# Altium PCB merigold.PcbDoc
Units mm, origin at the board's own origin, x right, y up, seen from the top; angles counter-clockwise.
Board outline 35.56 x 26.67 mm, 2 copper layers (Top Layer, Bottom Layer); 4 components, 14 nets, 35 pads, 0 vias.
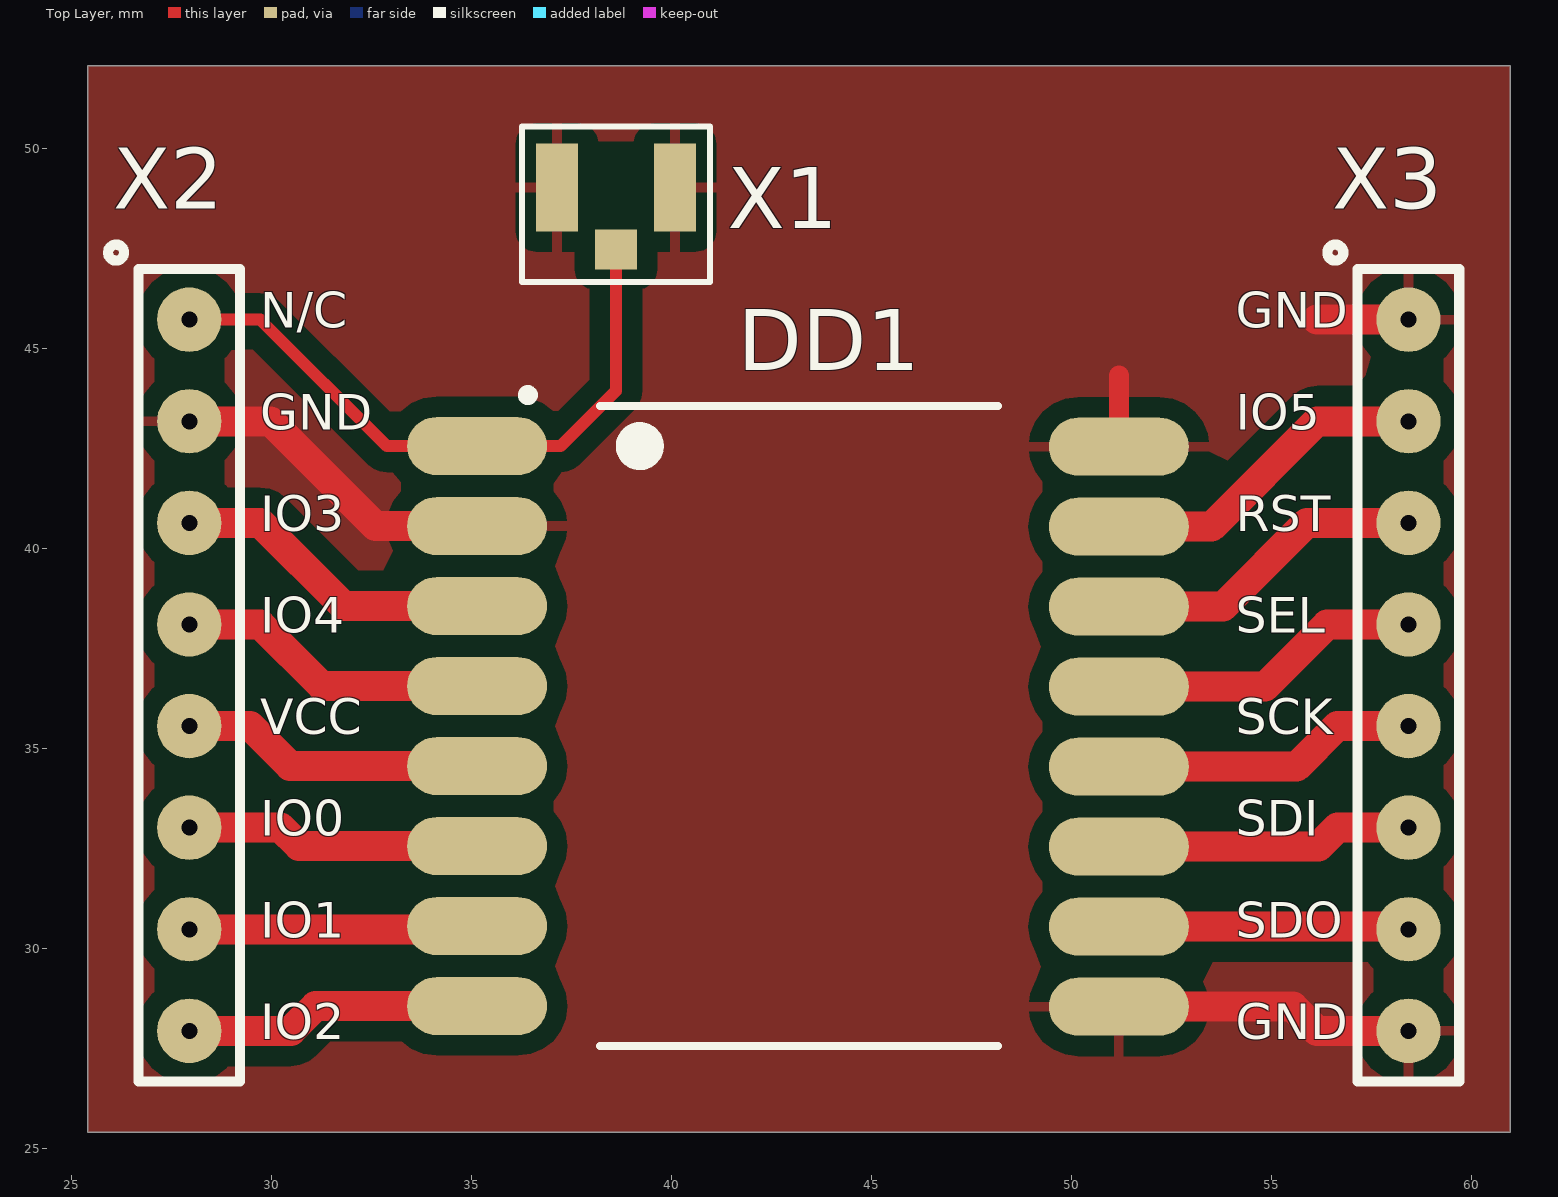
[diagram p0: Top Layer view]
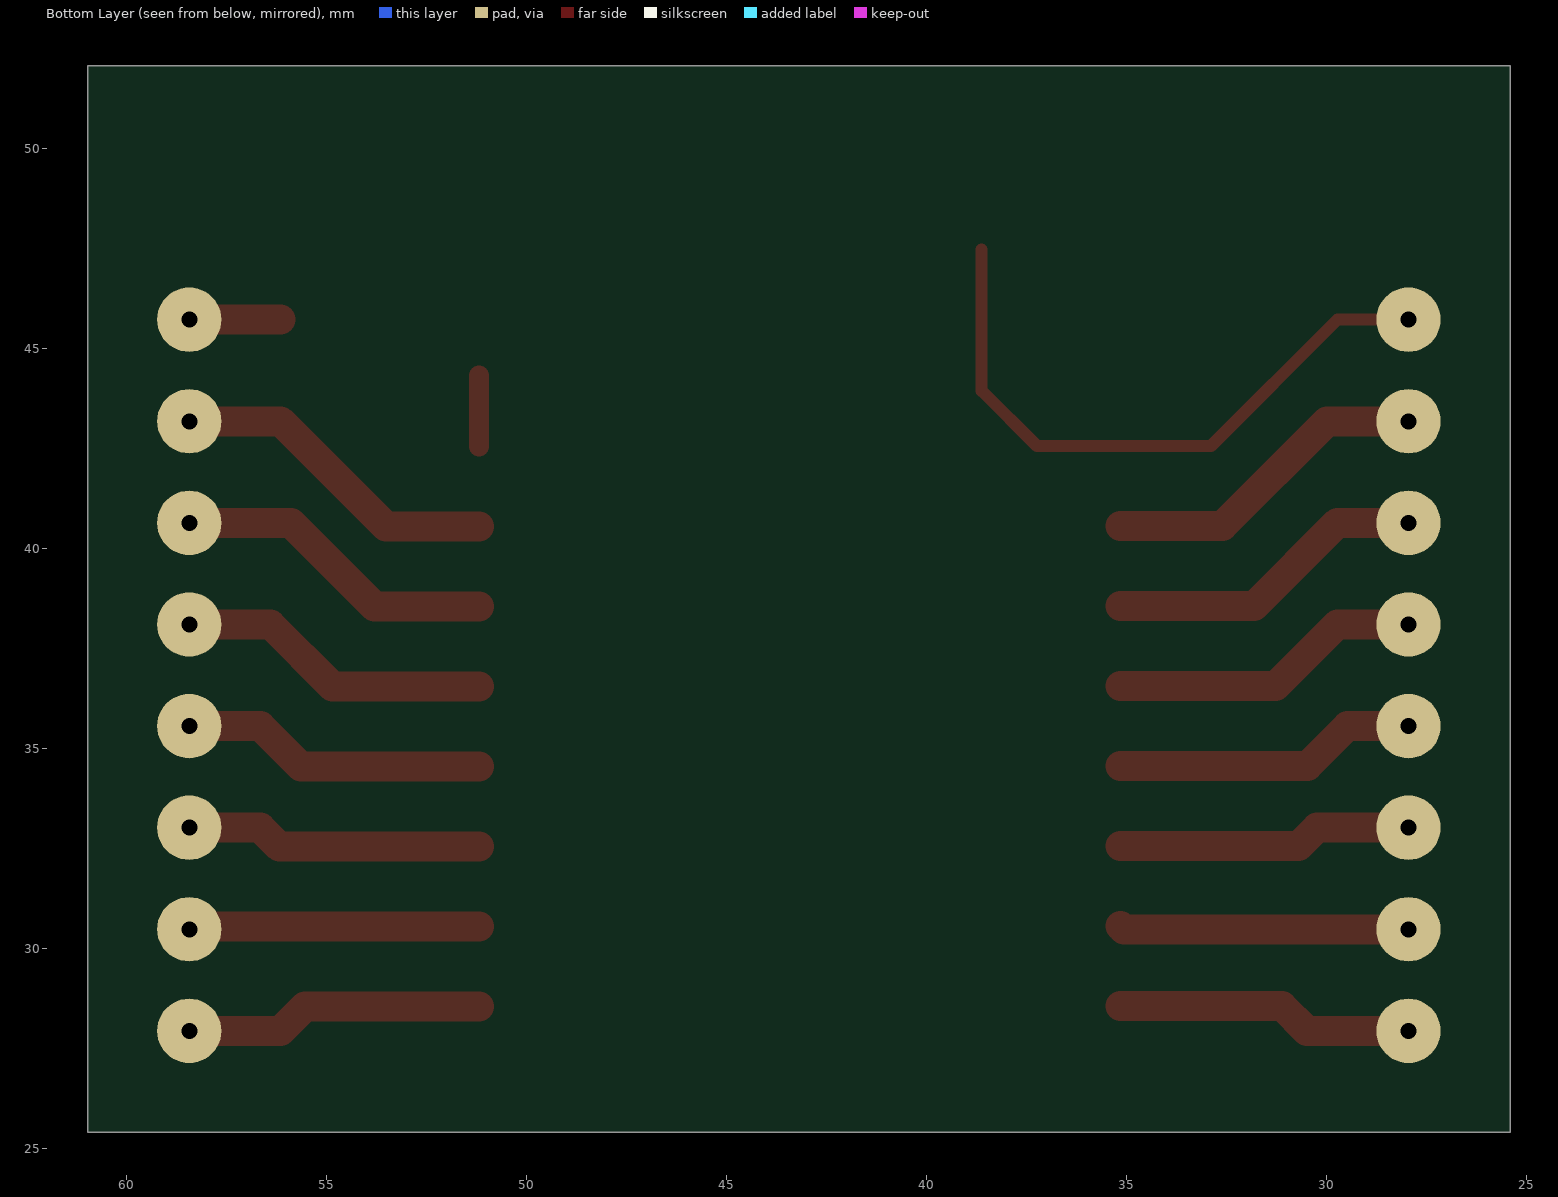
[diagram p1: Bottom Layer view, seen from below]

## Layer stack, top to bottom
Top Solder: solder mask 0.0102, Solder Resist, Dk 3.5
Top Layer: signal copper 0.0356
Dielectric 1: dielectric 0.32, FR-4, Dk 4.8
Bottom Layer: signal copper 0.0356
Bottom Solder: solder mask 0.0102, Solder Resist, Dk 3.5

## Board outline
25.4,25.4 60.96,25.4 60.96,52.07 25.4,52.07

## Design rules (kind name [scope] priority, off if disabled: settings)
Clearance [All] p1: gap=0.5 ignorepadtopadclearanceinfootprint=FALSE
PlaneClearance [All] p1: clearance=1
PlaneConnect [All] p1: planeconnectstyle=Relief reliefexpansion=0.508 reliefentries=4 reliefconductorwidth=0.3 reliefairgap=0.3
PolygonConnect [All] p1: connectstyle=Relief reliefconductorwidth=0.254 reliefentries=4 polygonreliefangle="90 Angle" airgapwidth=0.5
RoomDefinition merigold [InComponentClass('merigold')] p1: confinementstyle=ConfineIn formatcopy=TRUE lockcomponents=FALSE outline 25.4,25.4 60.96,25.4 60.96,52.07 25.4,52.07
RoutingVias [All] p1: holewidth=0.711 width=1.27 viastyle="Through Hole" minholewidth=0.711 minwidth=1.27 maxholewidth=0.711 maxwidth=1.27
SolderMaskExpansion [All] p1: expansion=0.102
Width [All] p1: maxlimit=1 minlimit=0.254 preferedwidth=0.254
28 further rules are at their usual default settings.

## Components (designator, comment, footprint, x,y, rotation, side; value= is the part's Value field where it differs from the comment)
DD1 "HPD13A (RFM95)" SOJ200P1600X200-16M 43.18,35.56 r0 top
X1 "U.FL-R-SMT-1_sch" U.FL-R-SMT-1 38.608,49.022 r0 top
X2 "PLS_8" PLS_8 27.94,45.72 r0 top
X3 "PLS_8" PLS_8 58.42,45.72 r0 top

## Footprints (in the part's own frame and the unit in brackets; to place one, negate y for a bottom-side part, rotate by r counter-clockwise, add the part's x,y. Pads: shape width x height; smd on the part's side, far side on the other; paste and mask are expansions set on the pad)
PLS_8 [mm]
  round 1.61 hole 0.4: 1(0,0) 2(0,-2.54) 3(0,-5.08) 4(0,-7.62) 5(0,-10.16) 6(0,-12.7) 7(0,-15.24) 8(0,-17.78)
  silkscreen extent -2.03,-19.05 1.27,1.88
SOJ200P1600X200-16M [mm] "SOJ, 16-Leads, Body 16,00x16,00mm, Pitch 2,00mm, IPC Low Density"
  oval 3.5x1.45 smd: 1(-8.045,7) 2(-8.045,5) 3(-8.045,3) 4(-8.045,1) 5(-8.045,-1) 6(-8.045,-3) 7(-8.045,-5) 8(-8.045,-7) 9(8.001,-7.015) 10(8.001,-5.015) 11(8.001,-3.015) 12(8.001,-1.015) 13(8.001,0.985) 14(8.001,2.985) 15(8.001,4.985) 16(8.001,6.985)
  silkscreen extent -6.9,-8 4.97,8.4, body extent -8,-8 8,8, height 2
U.FL-R-SMT-1 [mm]
  rect 1.05x1 smd mask+0.051: 1(0,-1.55)
  rect 1.05x2.2 smd mask+0.051: 2(1.475,0) 3(-1.475,0)
  Top Layer pour cut-out: -0.914,1.143 0.889,1.143 0.889,-1.118 0.914,-1.143 -0.914,-1.143
  Bottom Layer pour cut-out: -0.914,1.143 0.889,1.143 0.889,-1.118 0.914,-1.143 -0.914,-1.143
  silkscreen extent -2.35,-2.36 2.35,1.53, body extent -1.5,-1.55 1.5,1.55, height 1.25

## Part data
DD1: "RF TXRX MODULE ISM<1GHZ", Manufacturer="RF Solutions", Manufacturer Part Number=RFM95W-868S2, Category="RF/IF and RFID"
X2 X3: "CONN HEADER VERT 8POS 2.54MM", Manufacturer=Harwin, Manufacturer Part Number=M20-7820842, Category="Connector Headers and PCB Receptacles", Number of Contacts=8, Number of Rows=1, Pitch="2.54 mm"

## Nets (pads, with @x,y where several pads share a name; then routed paths per layer and width w, separated by ;. In a path a pad name is that pad's centre, name@x,y a point inside that pad or via, vN(x,y) a via of type N, cw(c..) or ccw(c..) an arc to the next point about the centre after c; other vN are vias at no path point)
GND: DD1.2 DD1.9 DD1.16 X1.2 X1.3 X2.2 X3.1 X3.8 | length 19.8
  Top Layer w0.5: DD1.16 51.181,44.323
  Top Layer w0.75: X2.2 29.972,43.18 32.592,40.56 DD1.2 ; DD1.9 55.529,28.545 56.134,27.94 X3.8 ; 56.134,45.72 X3.1
NetDD1_1: DD1.1 X1.1 X2.1 | length 16.1
  Top Layer w0.3: X2.1 29.718,45.72 32.878,42.56 DD1.1 37.226,42.56 38.608,43.942 X1.1
NetDD1_3: DD1.3 X2.3 | length 8.1
  Top Layer w0.75: X2.3 29.718,40.64 31.798,38.56 DD1.3
NetDD1_4: DD1.4 X2.4 | length 7.8
  Top Layer w0.75: X2.4 29.718,38.1 31.258,36.56 DD1.4
NetDD1_5: DD1.5 X2.5 | length 7.6
  Top Layer w0.75: X2.5 29.464,35.56 30.464,34.56 DD1.5
NetDD1_6: DD1.6 X2.6 | length 7.4
  Top Layer w0.75: X2.6 30.226,33.02 30.686,32.56 DD1.6
NetDD1_7: DD1.7 X2.7 | length 7.2
  Top Layer w0.75: X2.7 35.055,30.48 DD1.7
NetDD1_8: DD1.8 X2.8 | length 7.5
  Top Layer w0.75: X2.8 30.48,27.94 31.1,28.56 DD1.8
NetDD1_10: DD1.10 X3.7 | length 7.3
  Top Layer w0.75: DD1.10 58.355,30.545 X3.7
NetDD1_11: DD1.11 X3.6 | length 7.4
  Top Layer w0.75: DD1.11 56.167,32.545 56.642,33.02 X3.6
NetDD1_12: DD1.12 X3.5 | length 7.7
  Top Layer w0.75: DD1.12 55.627,34.545 56.642,35.56 X3.5
NetDD1_13: DD1.13 X3.4 | length 7.9
  Top Layer w0.75: DD1.13 54.833,36.545 56.388,38.1 X3.4
NetDD1_14: DD1.14 X3.3 | length 8.1
  Top Layer w0.75: DD1.14 53.785,38.545 55.88,40.64 X3.3
NetDD1_15: DD1.15 X3.2 | length 8.3
  Top Layer w0.75: DD1.15 53.499,40.545 56.134,43.18 X3.2

## Polygon pours and split planes (outlines as drawn)
GND on Top Layer "Top Overlay-No Net" (solid, pour order 0): 25.4,25.4 25.4,52.07 60.96,52.07 60.96,25.4

## Silkscreen, mask and mechanical layers (free items; w line width, h text height)
Top Overlay:
  text "N/C" at 29.718,45.212 h1.52
  text "GND" at 54.102,45.212 h1.52
  text "GND" at 29.718,42.672 h1.52
  text "IO5" at 54.102,42.672 h1.52
  text "IO3" at 29.718,40.132 h1.52
  text "RST" at 54.102,40.132 h1.52
  text "IO4" at 29.718,37.592 h1.52
  text "SEL" at 54.102,37.592 h1.52
  text "VCC" at 29.718,35.052 h1.52
  text "SCK" at 54.102,35.052 h1.52
  text "IO0" at 29.718,32.512 h1.52
  text "SDI" at 54.102,32.512 h1.52
  text "IO1" at 29.718,29.972 h1.52
  text "SDO" at 54.102,29.972 h1.52
  text "IO2" at 29.718,27.432 h1.52
  text "GND" at 54.102,27.432 h1.52
Board:
  the board outline again, w0.254